# EAGLE board rly (EAGLE 9.3.0)
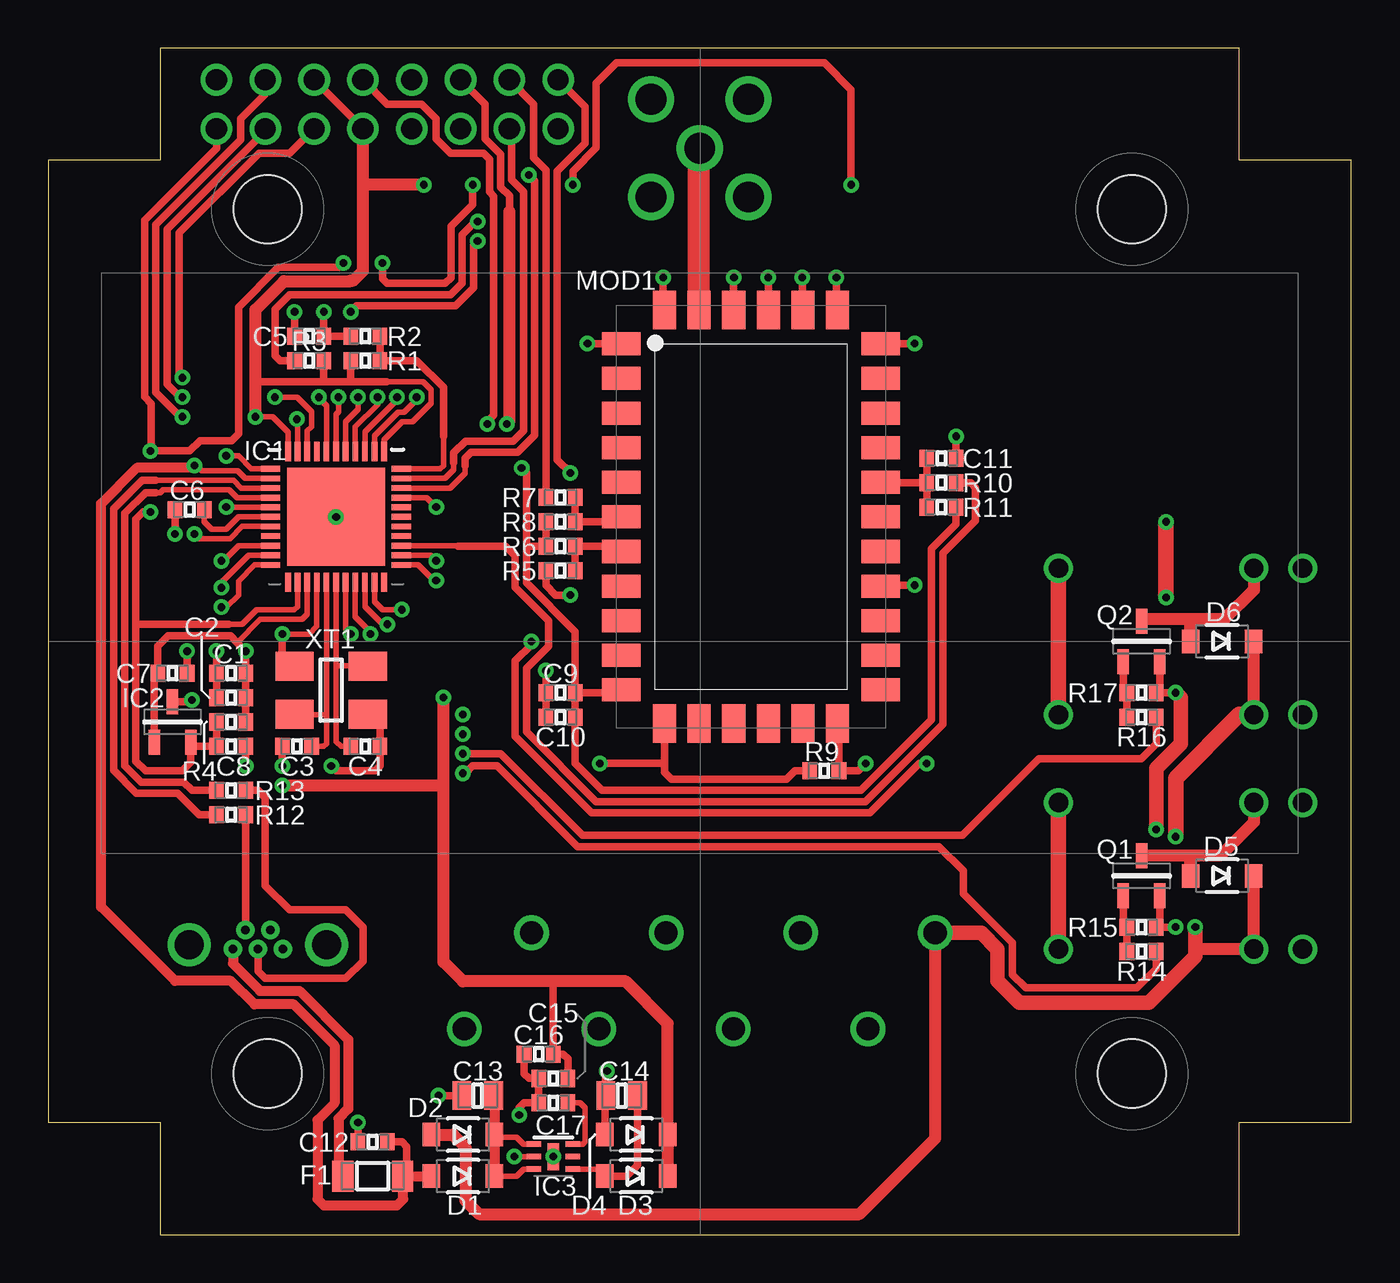
[diagram p0: board, top side]
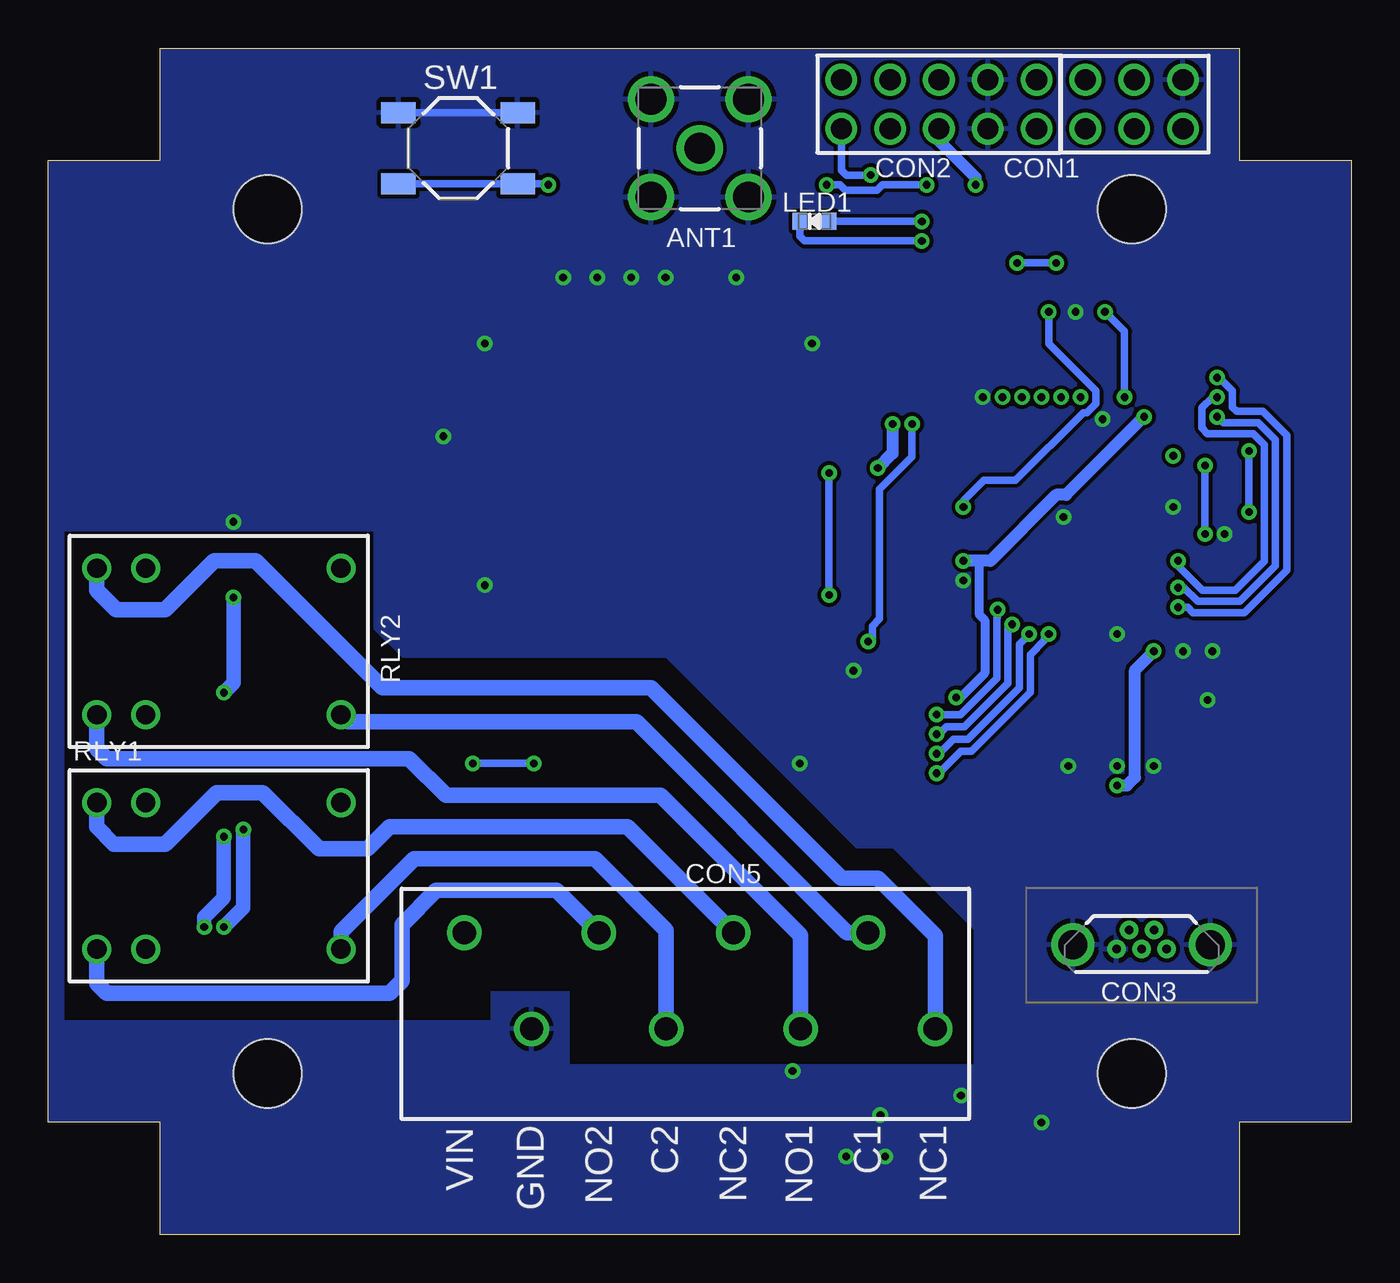
[diagram p1: board, bottom side, seen from below]

Size 67.82 x 61.72 mm. Coordinates in mm from the lower left corner, seen from the top.
Outline: 0,5.84 5.84,5.84 5.84,0 61.98,0 61.98,5.84 67.82,5.84 67.82,55.88 61.98,55.88 61.98,61.72 5.84,61.72 5.84,55.88 0,55.88 0,5.84
Copper layers (1*16): Top 0.035mm / dielectric 1.5mm / Bottom 0.035mm
Design rules "qfn": minimum track width 10mil, minimum drill 0.4mm, track to track 8mil, track to pad 10mil, pad to pad 8mil, via to via 8mil, smd to smd 0mil, copper to edge 0mil, drill to drill 6mil, minimum pad ring 10mil, minimum via ring 8mil, stop-mask expansion 4mil, vias tented up to drill 25mil, thermal gap 10mil
Holes 3.56 mm at 11.43,8.38 56.39,8.38 56.39,53.34 11.43,53.34
bRestrict: area 27.7,52.2 to 28.2,53.2

## Footprints (pad centres in the part's own frame; a part is rotated, then mirrored left to right if it is on the bottom)
SMA-RF = drill 1.6: 1 0,0; 2 -2.54,2.54; 3 -2.54,-2.54; 4 2.54,-2.54; 5 2.54,2.54
0603 = smd 0.762 x 0.889: 1 -0.762,0; 2 0.762,0
0805 = smd 0.97 x 1.47: 1 -0.83,0; 2 0.83,0
ISP = drill 1.1 pad 1.65: 1 0,0; 2 2.54,0; 3 0,-2.54; 4 2.54,-2.54; 5 0,-5.08; 6 2.54,-5.08
HEADER-10P-2R-DIP-2_54MM = drill 1.1 pad 1.65: 1 0,0; 2 2.54,0; 3 5.08,0; 4 7.62,0; 5 10.16,0; 6 0,2.54; 7 2.54,2.54; 8 5.08,2.54; 9 7.62,2.54; 10 10.16,2.54
USB-MICRO-DIP-VER = drill 0.45: 1 -1.3,0; 2 -0.65,-1; 3 0,0; 4 0.65,-1; 5 1.3,0 | drill 1.5: 6 -3.575,-0.22; 7 3.575,-0.22
CON-3_50MM-8P-1985250 = drill 1.2: 1 12.25,-2.5; 2 8.75,2.5; 3 5.25,-2.5; 4 1.75,2.5; 5 -1.75,-2.5; 6 -5.25,2.5; 7 -8.75,-2.5; 8 -12.25,2.5
SOD123-DIODE = smd 0.91 x 1.22: 1 -1.635,0; 2 1.635,0
1206 = smd 1.1 x 1.6: 1 -1.55,0; 2 1.55,0
QFN-44 = smd 1 x 0.3: 1 -3.4,2.5; 2 -3.4,2; 3 -3.4,1.5; 4 -3.4,1; 5 -3.4,0.5; 6 -3.4,0; 7 -3.4,-0.5; 8 -3.4,-1; 9 -3.4,-1.5; 10 -3.4,-2; 11 -3.4,-2.5; 23 3.4,-2.5; 24 3.4,-2; 25 3.4,-1.5; 26 3.4,-1; 27 3.4,-0.5; 28 3.4,0; 29 3.4,0.5; 30 3.4,1; 31 3.4,1.5; 32 3.4,2; 33 3.4,2.5 | smd 0.3 x 1: 12 -2.5,-3.4; 13 -2,-3.4; 14 -1.5,-3.4; 15 -1,-3.4; 16 -0.5,-3.4; 17 0,-3.4; 18 0.5,-3.4; 19 1,-3.4; 20 1.5,-3.4; 21 2,-3.4; 22 2.5,-3.4; 34 2.5,3.4; 35 2,3.4; 36 1.5,3.4; 37 1,3.4; 38 0.5,3.4; 39 0,3.4; 40 -0.5,3.4; 41 -1,3.4; 42 -1.5,3.4; 43 -2,3.4; 44 -2.5,3.4 | smd 5.1 x 5.1: 45 0,0
SOT23-3 = smd 1.3 x 0.6: 1 -1.05,0.95; 2 -1.05,-0.95; 3 1.05,0
VDFN-6 = smd 0.75 x 0.3: 1 -1.025,0.65; 2 -1.025,0; 3 -1.025,-0.65; 4 1.025,-0.65; 5 1.025,0; 6 1.025,0.65 | smd 0.6 x 1.4: 7 0,0
LED-0603 = smd 0.762 x 0.889: 1 -0.762,0; 2 0.762,0
RAK811 = smd 2 x 1.2: 1 -6.75,9; 2 -6.75,7.2; 3 -6.75,5.4; 4 -6.75,3.6; 5 -6.75,1.8; 6 -6.75,0; 7 -6.75,-1.8; 8 -6.75,-3.6; 9 -6.75,-5.4; 10 -6.75,-7.2; 11 -6.75,-9; 18 6.75,-9; 19 6.75,-7.2; 20 6.75,-5.4; 21 6.75,-3.6; 22 6.75,-1.8; 23 6.75,0; 24 6.75,1.8; 25 6.75,3.6; 26 6.75,5.4; 27 6.75,7.2; 28 6.75,9 | smd 1.2 x 2: 12 -4.5,-10.75; 13 -2.7,-10.75; 14 -0.9,-10.75; 15 0.9,-10.75; 16 2.7,-10.75; 17 4.5,-10.75; 29 4.5,10.75; 30 2.7,10.75; 31 0.9,10.75; 32 -0.9,10.75; 33 -2.7,10.75; 34 -4.5,10.75
JRC-21F-4100 = drill 1: 1 -6.35,3.81; 2 -3.81,3.81; 3 6.35,3.81; 4 -6.35,-3.81; 5 -3.81,-3.81; 6 6.35,-3.81
BUTTON-4P-SMD-5X5 = smd 1.8 x 1.1: 1 -3.1,1.85; 2 -3.1,-1.85; 3 3.1,-1.85; 4 3.1,1.85
CRYSTAL-5032-4P = smd 2 x 1.5: 1 -1.9,-1.25; 2 1.9,-1.25; 3 1.9,1.25; 4 -1.9,1.25

## Placement (x,y rotation side)
ANT1  [SMA-RF]  33.91,56.52 0 bottom
C1  [0603]  9.53,29.21 0 top
C2  [0603]  9.53,27.94 0 top
C3  [0603]  12.95,25.4 0 top
C4  [0603]  16.51,25.4 180 top
C5  [0603]  13.59,46.74 180 top
C6  [0603]  7.37,37.72 0 top
C7  [0603]  6.48,29.21 180 top
C8  [0603]  9.53,25.4 180 top
C9  [0603]  26.67,28.19 0 top
C10  [0603]  26.67,26.92 0 top
C11  [0603]  46.48,40.39 180 top
C12  [0603]  16.89,4.83 0 top
C13  [0805]  22.35,7.24 0 top
C14  [0805]  29.84,7.24 0 top
C15  [0603]  26.29,8.13 0 top
C16  [0603]  25.53,9.4 0 top
C17  [0603]  26.29,6.86 0 top
CON1  [ISP]  13.84,57.53 90 bottom
CON2  [HEADER-10P-2R-DIP-2_54MM]  26.54,57.53 0 bottom
CON3  [USB-MICRO-DIP-VER]  10.92,14.86 180 bottom
CON4  [CON-3_50MM-8P-1985250]  33.91,13.21 0 bottom
D1  [SOD123-DIODE]  21.59,3.05 180 top
D2  [SOD123-DIODE]  21.59,5.21 180 top
D3  [SOD123-DIODE]  30.61,3.05 180 top
D4  [SOD123-DIODE]  30.61,5.21 180 top
D5  [SOD123-DIODE]  61.09,18.67 180 top
D6  [SOD123-DIODE]  61.09,30.86 180 top
F1  [1206]  16.89,3.05 0 top
IC1  [QFN-44]  14.99,37.34 0 top
IC2  [SOT23-3]  6.48,26.67 90 top
IC3  [VDFN-6]  26.29,4.06 0 top
LED1  [LED-0603]  27.94,52.7 0 bottom
MOD1  [RAK811]  36.58,37.34 0 top
Q1  [SOT23-3]  56.9,18.67 90 top
Q2  [SOT23-3]  56.9,30.86 90 top
R1  [0603]  16.51,45.47 180 top
R2  [0603]  16.51,46.74 0 top
R3  [0603]  13.59,45.47 0 top
R4  [0603]  9.53,26.67 180 top
R5  [0603]  26.67,34.54 0 top
R6  [0603]  26.67,35.81 180 top
R7  [0603]  26.67,38.35 0 top
R8  [0603]  26.67,37.08 180 top
R9  [0603]  40.39,24.13 180 top
R10  [0603]  46.48,39.12 0 top
R11  [0603]  46.48,37.85 0 top
R12  [0603]  9.53,21.84 180 top
R13  [0603]  9.53,23.11 180 top
R14  [0603]  56.9,14.73 180 top
R15  [0603]  56.9,16 180 top
R16  [0603]  56.9,26.92 180 top
R17  [0603]  56.9,28.19 180 top
RLY1  [JRC-21F-4100]  58.93,18.67 0 bottom
RLY2  [JRC-21F-4100]  58.93,30.86 0 bottom
SW1  [BUTTON-4P-SMD-5X5]  46.48,56.52 180 bottom
XT1  [CRYSTAL-5032-4P]  14.73,28.32 0 top

## Library data of the parts
ANT1 C1-C17 CON1-CON4 D1-D6 F1 IC1-IC3 LED1 MOD1 Q1 Q2 R1-R17 RLY1 RLY2 SW1 XT1 = SamacSys_Parts

## Nets
GND: ANT1.2 ANT1.3 ANT1.4 ANT1.5 C1.1 C2.1 C3.1 C4.1 C5.1 C6.1 C7.1 C8.1 C9.1 C10.1 C11.1 C12.1 C13.1 C14.1 C15.1 C16.1 C17.1 CON1.6 CON2.4 CON2.9 CON3.5 CON3.6 CON3.7 CON4.7 D4.2 IC1.5 IC1.15 IC1.23 IC1.35 IC1.43 IC1.45 IC2.3 IC3.2 IC3.7 MOD1.1 MOD1.12 MOD1.21 MOD1.28 MOD1.29 MOD1.30 MOD1.31 MOD1.32 MOD1.34 Q1.2 Q2.2 R2.1 R9.2 R15.1 R17.1 SW1.2 SW1.3 XT1.2 XT1.4
N$1: IC1.37
N$2: C11.2 MOD1.24 R10.1 R11.1
N$3: CON1.1 IC1.11
N$4: ANT1.1 MOD1.33
N$5: IC1.21
N$6: MOD1.7 R5.2 R6.1
N$7: MOD1.6 R7.2 R8.1
N$8: IC1.36
N$9: CON1.4 IC1.10
N$10: C3.2 IC1.16 XT1.1
N$11: CON2.1 IC1.31
N$12: C4.2 IC1.17 XT1.3
N$13: C9.2 C10.2 CON2.8 MOD1.11 R6.2 R8.2 R11.2
N$14: CON2.7 R7.1
N$15: Q1.1 R14.2 R15.2
N$16: IC1.25 R10.2
N$17: IC1.39
N$18: IC1.38
N$19: IC1.30 LED1.1
N$20: Q2.1 R16.2 R17.2
N$21: CON4.1 RLY2.1
N$22: D5.2 Q1.3 RLY1.2
N$23: D6.2 Q2.3 RLY2.2
N$24: CON4.3 RLY2.4
N$25: CON4.4 RLY1.1
N$26: CON4.2 RLY2.3 RLY2.6
N$27: IC1.40
N$29: CON2.2 IC1.32
N$30: CON4.6 RLY1.4
N$31: C5.2 IC1.42
N$32: CON4.5 RLY1.3 RLY1.6
N$33: CON3.1 F1.1
N$34: C6.2 IC1.6
N$35: LED1.2 R3.1
N$37: C17.2 IC3.6
N$38: C13.2 D1.1 D2.1 IC3.1 IC3.3
N$39: IC1.1
N$40: C14.2 D3.2 IC3.4
N$41: CON3.2 R12.1
N$42: CON3.3 R13.1
N$43: IC1.3 R12.2
N$44: IC1.4 R13.2
N$45: CON1.3 IC1.9
N$52: IC1.18 R14.1
N$54: IC1.19 R16.1
N$57: IC1.20
N$60: CON2.6 R5.1
N$61: IC1.33 R1.1 R2.2
N$63: CON2.10 MOD1.17 R9.1
N$64: C8.2 CON1.5 IC1.13 IC2.2 R4.2 SW1.1 SW1.4
UVCC: C12.2 D1.2 F1.2 IC1.2 IC1.7
VCC: C1.2 C2.2 C7.2 C15.2 C16.2 CON1.2 CON2.3 CON2.5 D3.1 D4.1 IC1.14 IC1.24 IC1.34 IC1.44 IC2.1 R1.2 R3.2 R4.1
VEXT: CON4.8 D2.2 D5.1 D6.1 RLY1.5 RLY2.5

## Tracks (layer width: path | path; a pad name or v marks a point on that pad's centre or on a via)
GND  (via drill 0.4)
  Top 0.292: IC1.43 12.99,42.39 v12.95,42.42 | IC1.35 16.99,41.5 16.99,41.57 18.21,42.79 18.53,42.79 19.18,43.43 v19.18,43.56 | IC1.5 9.28,37.84 v9.27,37.85 | IC1.15 13.99,31.64 13.58,31.24 v12.2,31.24 v12.19,31.24 | IC3.2 v24.26,4.06 | IC1.23 19.26,34.84 20.07,34.04 v20.19,34.04
  Top 0.381: C3.1 v12.19,24.38 | v14.73,24.38 14.99,24.13 17.02,24.13 17.27,24.38 C4.1 17.27,26.43 XT1.2 | C8.1 v10.29,24.38 | C7.1 v7.24,30.35 | IC2.3 7.4,27.72 v7.49,27.81 | v8.76,30.35 C1.1 C2.1 | MOD1.34 32,48.16 v32,49.78 | MOD1.1 29.81,46.35 v28.07,46.35 | MOD1.32 35.68,49.77 v35.69,49.78 | MOD1.31 v37.48,49.77 v37.47,49.78 | MOD1.30 39.24,48.12 v39.24,49.78 | MOD1.29 41.02,48.14 v41.02,49.78 | MOD1.28 43.34,46.35 v45.09,46.35 | MOD1.21 43.37,33.78 v45.09,33.78 | C10.1 C9.1 v25.91,29.34 | C6.1 v6.6,36.45 | C13.1 v20.32,7.24 | v16.13,5.84 C12.1 | C16.1 24.77,8.38 25.02,8.13 C15.1 C17.1 24.77,6.86 24.51,6.6 v24.51,6.22 | D4.2 28.97,7.2 C14.1 29.02,8.44 v29.08,8.51 | R2.1 C5.1 v14.35,48.01 | C11.1 v47.24,41.53 | v12.19,31.24 12.19,30.21 XT1.4 | R9.2 38.86,24.13 38.43,23.7 32.44,23.7 32.08,24.06 32.08,24.51 | Q1.2 57.85,16.19 R15.1 v58.67,16 | Q2.2 57.85,28.38 R17.1 v58.67,28.19 | 32.08,24.51 MOD1.12 | v28.7,24.51 32.08,24.51
  Top 0.762: v58.67,28.19 58.93,27.94 58.93,25.53 57.66,24.26 v57.66,21.08
  Top 0.813: v58.17,37.08 v58.17,33.15
  Bottom 0.381: SW1.2 SW1.3
  Bottom 0.762: v57.66,21.08 57.66,17.02 v58.67,16 | v58.17,33.15 58.17,28.7 v58.67,28.19
  other vias: 14.99,37.34 26.29,4.06
  pour Bottom: 0.13,5.97 0.13,55.75 5.97,55.75 5.97,61.59 61.85,61.59 61.85,55.75 67.69,55.75 67.69,5.97 61.85,5.97 61.85,0.13 5.97,0.13 5.97,5.97
N$1  (via drill 0.4)
  Top 0.292: IC1.37 15.99,42.02 17.14,43.18 v17.14,43.56
N$2
  Top 0.381: R10.1 R11.1 | MOD1.24 43.35,39.12 R10.1 | R10.1 C11.2
N$3  (via drill 0.4)
  Top 0.292: IC1.11 10.76,34.84 9.91,33.99 9.91,33.27 9.27,32.64 v9.02,32.64
  Top 0.381: CON1.1 12.57,56.26 10.99,56.26 6.83,52.11 6.83,44.73 v6.99,44.58
  Bottom 0.381: v6.99,44.58 6.87,44.58 6.19,43.89 6.19,43.04 5.97,42.82 4.61,42.82 3.37,41.58 3.37,34.55 5.56,32.36 8.25,32.36 8.53,32.64 v9.02,32.64
N$4
  Top 1.143: MOD1.33 33.88,56.48 ANT1.1
N$5  (via drill 0.4)
  Top 0.292: IC1.21 16.99,32.92 17.4,32.51 v18.41,32.51
  Bottom 0.381: v18.41,32.51 18.41,32.12 18.46,32.07 18.46,28.95 19.78,27.63 19.78,27.61 20.34,27.05 v21.59,27.05
N$6
  Top 0.381: R5.2 R6.1 29.55,35.81 MOD1.7
N$7
  Top 0.381: R7.2 R8.1 29.57,37.08 MOD1.6
N$8  (via drill 0.4)
  Top 0.292: IC1.36 16.49,41.63 16.49,41.64 16.49,41.77 18.16,43.44 v18.16,43.56
N$9  (via drill 0.4)
  Top 0.292: IC1.10 10.45,35.34 9.02,33.91 v9.02,33.66
  Top 0.381: CON1.4 11.3,59.33 10.03,58.06 10.03,56.96 5.6,52.53 5.6,43.81 6.87,42.55 v6.99,42.55
  Bottom 0.381: v6.99,42.55 6.68,42.24 4.85,42.24 3.95,41.34 3.95,34.8 5.81,32.94 8.01,32.94 8.72,33.66 v9.02,33.66
N$10
  Top 0.292: IC1.16 14.49,27.05 | 14.49,27.05 14.49,25.54 14.35,25.4 C3.2 | XT1.1 12.85,27.05 14.49,27.05
N$11  (via drill 0.4)
  Top 0.292: IC1.31 20.93,38.84 21.7,39.6 21.7,40.01
  Top 0.381: v25.02,55.12 25.32,54.81 25.32,41.58 24.43,40.69 22,40.69 21.7,40.39 21.7,40.01
  Bottom 0.381: v25.02,55.12 26.29,55.12 26.54,55.37 CON2.1
N$12
  Top 0.292: IC1.17 14.99,29.59 | 14.99,29.59 14.99,25.65 15.24,25.4 C4.2 | XT1.3 16.61,29.59 14.99,29.59
N$13  (via drill 0.4)
  Top 0.381: C9.2 C10.2 27.43,24.51 28.83,23.11 42.29,23.11 45.97,26.8 45.97,35.69 47.24,36.96 R11.2 | C9.2 29.68,28.19 MOD1.11 | R8.2 R6.2 24.89,35.81 | C9.2 27.43,31.37 24.89,33.91 24.89,35.81 | v24.64,39.88 24.89,39.62 24.89,35.81 | CON2.8 22.73,58.8 22.73,57.01 23.55,56.19 23.55,54.49 24,54.04 24,53.21
  Top 0.635: v23.88,42.16 24,42.29 24,53.21
  Bottom 0.635: v23.88,42.16 23.88,40.64 v24.64,39.88
N$14
  Top 0.381: CON2.7 25.27,58.8 25.27,56.01 25.91,55.37 R7.1
N$15
  Top 0.381: Q1.1 55.95,16.19 R15.2 R14.2
N$16
  Top 0.292: 21.34,35.81 21.31,35.84 IC1.25
  Top 0.381: R10.2 48.01,39.12 48.26,38.86 48.26,37.15 46.56,35.45 46.56,26.55 42.53,22.53 28.52,22.53 24.89,26.16 24.89,29.46 26.04,30.61 26.04,31.94 24.31,33.67 24.31,35.31 23.8,35.81 21.34,35.81
N$17  (via drill 0.4)
  Top 0.292: IC1.39 14.99,42.67 15.11,42.8 v15.11,43.56
N$18  (via drill 0.4)
  Top 0.292: IC1.38 15.49,42.28 16.13,42.93 v16.13,43.56
N$19  (via drill 0.4)
  Top 0.292: IC1.30 19.7,38.34 v20.19,37.85
  Top 0.381: v15.75,48.01 16.05,48.31 21.2,48.31 22.14,49.25 22.14,51.48 v22.35,51.69
  Bottom 0.381: LED1.1 28.7,51.94 28.45,51.69 v22.35,51.69 | v15.75,48.01 15.75,46.34 13.3,43.89 13.3,43.23 13.77,42.76 13.96,42.76 17.48,39.24 19.13,39.24 20.17,38.2 20.17,37.87 v20.19,37.85
N$20
  Top 0.381: Q2.1 55.95,28.38 R17.2 R16.2
N$21
  Bottom 0.813: CON4.1 21.66,15.56 24.64,18.54 26.54,18.54 36.45,28.45 50.42,28.45 57.02,35.05 59.18,35.05 61.72,32.51 64.26,32.51 65.28,33.53 RLY2.1
N$22
  Top 0.635: RLY1.2 62.74,21.46 60.99,19.72 59.44,19.72 | 59.44,19.72 Q1.3 | D5.2 59.44,18.68 59.44,19.72
N$23
  Top 0.635: RLY2.2 62.74,33.53 61.21,32 59.44,32 | 59.44,32 56.99,32 Q2.3 | D6.2 59.44,30.88 59.44,32
N$24
  Bottom 0.813: CON4.3 28.66,15.58 35.94,22.86 47.12,22.86 49.02,24.77 64.77,24.77 65.28,25.27 RLY2.4
N$25
  Bottom 0.813: CON4.4 37.66,21.21 50.04,21.21 51.18,20.07 53.72,20.07 56.64,22.99 59.05,22.99 61.72,20.32 64.39,20.32 65.28,21.21 RLY1.1
N$26
  Top 0.813: RLY2.3 RLY2.6
  Bottom 0.813: CON4.2 26.25,15.71 37.21,26.67 52.2,26.67 RLY2.6
N$27  (via drill 0.4)
  Top 0.292: v14.1,43.56 14.1,43.51 14.49,43.12 IC1.40
N$29
  Top 0.292: IC1.32 20.67,39.34 21.11,39.78 21.11,40.16
  Top 0.381: CON2.2 24.13,57.4 24.13,54.86 24.74,54.25 24.74,41.82 24.19,41.27 21.72,41.27 21.11,40.67 21.11,40.16
N$30
  Bottom 0.813: CON4.6 41.36,17.91 47.62,17.91 49.4,16.13 49.4,13.21 50.04,12.57 64.77,12.57 65.28,13.08 RLY1.4
N$31  (via drill 0.4)
  Top 0.292: IC1.42 13.49,41.81 13.72,42.04 13.72,42.8 12.95,43.56 v11.81,43.56
  Top 0.381: C5.2 v12.83,48.01
  Bottom 0.381: v11.81,43.56 11.81,46.99 v12.83,48.01
N$32
  Top 0.813: RLY1.3 RLY1.6
  Bottom 0.813: CON4.5 35.66,15.85 39.37,19.56 48.77,19.56 52.58,15.75 RLY1.6
N$33
  Top 0.508: CON3.1 9.62,14.1 11.04,12.69 13.08,12.69 15.62,10.15 15.62,6.55 15.11,6.04 15.11,3.28 F1.1
N$34
  Top 0.292: IC1.6 9.91,37.34 9.27,36.7 8.51,36.7 8.13,37.08 C6.2
N$35  (via drill 0.4)
  Top 0.381: R3.1 12.06,45.47 11.81,45.72 11.81,48.13 12.57,48.9 20.95,48.9 21.55,49.49 21.55,52.02 22.24,52.7 v22.35,52.7
  Bottom 0.381: LED1.2 v22.35,52.7
N$37
  Top 0.292: IC3.6 27.83,4.71 27.94,4.83 27.94,6.6 27.69,6.86 C17.2
N$38
  Top 0.292: IC3.1 24.75,4.71 24.38,5.08 23.35,5.08 D2.1 | IC3.3 24.75,3.41 24.38,3.05 D1.1
  Top 0.508: D1.1 D2.1 23.23,7.2 C13.2
N$39  (via drill 0.4)
  Top 0.292: IC1.1 10.58,39.84 9.91,40.51 v9.27,40.51
N$40
  Top 0.292: IC3.4 28.61,3.41 D3.2
  Top 0.381: C14.2 30.68,3.62 30.1,3.05 D3.2
N$41
  Top 0.381: R12.1 10.29,19.3 10.27,19.29 CON3.2
N$42
  Top 0.381: CON3.3 10.92,13.72 11.3,13.34 15.49,13.34 16.38,14.22 16.38,16 15.49,16.89 12.57,16.89 11.3,18.16 11.3,22.73 10.92,23.11 R13.1
N$43
  Top 0.292: IC1.3 10.06,38.84 9.65,39.24 5.59,39.24
  Top 0.381: 5.59,39.24 4.89,39.24 3.4,37.76 3.4,24.15 4.6,22.96 6.76,22.96 7.87,21.84 R12.2
N$44
  Top 0.292: IC1.4 9.84,38.34 9.43,38.75 5.98,38.75 5.83,38.6 5.6,38.6
  Top 0.381: 5.6,38.6 5.07,38.6 3.99,37.52 3.99,24.4 4.84,23.55 7.06,23.55 7.49,23.11 R13.2
N$45  (via drill 0.4)
  Top 0.292: IC1.9 9.93,35.84 9.14,35.05 v9.02,35.05
  Top 0.381: CON1.3 11.3,57.4 6.19,52.29 6.19,44.25 6.87,43.56 v6.99,43.56
  Bottom 0.381: v6.99,43.56 7.22,43.56 7.78,43 7.78,41.96 7.49,41.67 7.49,41.66 5.1,41.66 4.54,41.1 4.54,35.04 6.05,33.53 7.76,33.53 9.02,34.78 v9.02,35.05
N$46
  cutout Bottom: 19.68,8.89 40.64,8.89 40.64,12.7 44.83,12.7 44.83,11.18 66.93,11.18 66.93,36.58 50.93,36.58 50.93,31.5 49.4,29.97 35.69,29.97 25.78,20.07 23.88,20.07 19.68,15.88
N$52  (via drill 0.4)
  Top 0.292: IC1.18 15.49,31.5 v15.75,31.24
  Top 0.381: v21.59,24 21.72,24 22.1,24.38 23.36,24.38 27.56,20.19 46.35,20.19 47.62,18.92 47.62,17.73 50.18,15.18 50.18,13.53 50.87,12.84 56.66,12.84 57.66,13.84 R14.1
  Bottom 0.381: v15.75,31.24 15.97,31.02 15.97,30.91 16.7,30.18 16.7,28.2 19.76,25.15 20.32,25.15 21.46,24 v21.59,24
N$54  (via drill 0.4)
  Top 0.292: IC1.19 15.99,32.15 16.76,31.37 v16.76,31.24
  Top 0.381: v21.59,25.02 23.56,25.02 27.8,20.78 47.57,20.78 51.56,24.77 56.9,24.77 57.66,25.53 R16.1
  Bottom 0.381: v16.76,31.24 17.29,30.72 17.29,28.45 19.95,25.78 20.7,25.78 21.46,25.02 v21.59,25.02
N$57  (via drill 0.4)
  Top 0.292: IC1.20 16.49,32.66 17.4,31.75 v17.65,31.75
  Bottom 0.381: v17.65,31.75 17.87,31.53 17.87,28.69 20.14,26.42 21.08,26.42 21.46,26.04 v21.59,26.04
N$60  (via drill 0.4)
  Top 0.381: CON2.6 27.94,58.67 27.94,56.77 26.49,55.32 26.49,40.31 v27.18,39.62 | R5.1 25.91,33.78 26.42,33.27 v27.18,33.27
  Bottom 0.381: v27.18,33.27 v27.18,39.62
N$61
  Top 0.292: IC1.33 20.41,39.84 20.57,40.01 20.57,41.53
  Top 0.381: R2.2 R1.1 19.18,45.47 20.57,44.07 20.57,41.53
N$63  (via drill 0.4)
  Top 0.381: MOD1.17 41.15,26.52 R9.1 42.16,24.13 v42.55,24.51 | CON2.10 17.65,58.8 19.45,58.8 20.19,58.06 20.19,57.01 20.94,56.26 22.65,56.26 22.96,55.95 22.96,54.24 23.19,54.01 23.19,42.62 22.86,42.29 v22.86,42.16 | v45.72,24.51 45.34,24.51 42.77,21.95 28.28,21.95 24.31,25.92 24.31,29.86 25.15,30.7 v25.15,30.86
  Bottom 0.381: v45.72,24.51 v42.55,24.51 | v25.15,30.86 24.93,31.08 24.93,31.65 24.55,32.03 24.55,38.77 22.86,40.47 v22.86,42.16
N$64  (via drill 0.4)
  Top 0.292: IC1.13 12.99,32.67 12.81,32.5 10.84,32.5 10.1,31.75 9.4,31.75
  Top 0.381: R4.2 C8.2 7.65,25.4 IC2.2 7.43,24.57 6.99,24.13 5.08,24.13 4.57,24.64 4.57,31.75 | CON1.5 8.76,56.52 5.02,52.77 5.02,43.57 5.37,43.22 5.37,40.81 v5.33,40.77 7.38,40.77 7.92,41.31 9.56,41.31 9.91,41.66 9.91,48.24 11.98,50.32 15.14,50.32 v15.37,50.55 | v5.33,37.59 4.95,37.59 4.57,37.21 4.57,31.75 | 9.4,31.75 4.57,31.75 | v41.78,54.61 41.78,59.56 40.39,60.96 29.59,60.96 28.52,59.89 28.52,56.53 27.3,55.31 v27.3,54.61 | v17.4,50.55 17.4,49.73 17.65,49.48 20.67,49.48 20.97,49.78 20.97,52.45 22.1,53.58 v22.1,54.61
  Bottom 0.381: v5.33,40.77 v5.33,37.59 | SW1.4 SW1.1 41.84,54.66 v41.78,54.61 | v22.1,54.61 24.4,54.61 24.69,54.32 26.32,54.32 26.61,54.61 v27.3,54.61 | v17.4,50.55 v15.37,50.55
UVCC  (via drill 0.4)
  Top 0.292: IC1.7 10.11,36.84 9.48,36.21 7.86,36.21 v7.62,36.45 | v7.62,40.01 7.73,40.01 8,39.74 9.86,39.74 10.26,39.34 IC1.2
  Top 0.381: C12.2 18.41,4.83 18.67,4.57 18.67,3.05
  Top 0.508: v7.62,40.01 7.51,39.89 4.62,39.89 2.76,38.03 2.76,17.06 6.6,13.21 9.51,13.21 10.74,11.98 12.79,11.98 14.91,9.86 14.91,6.84 14.02,5.96 14.02,1.85 14.35,1.52 18.16,1.52 18.48,1.85 18.48,3.01 F1.2 18.67,3.05 D1.2
  Bottom 0.381: v7.62,40.01 v7.62,36.45
VCC  (via drill 0.4)
  Top 0.292: IC1.14 13.49,32.28 13.21,32 11.05,32 9.84,30.8 | IC1.24 19.91,35.34 v20.19,35.05 | IC1.44 12.49,41.74 11.68,42.55 v10.79,42.55 | IC1.34 17.49,41.36 18.41,42.29 18.97,42.29 19.94,43.26 19.94,43.94 19.52,44.36 17.62,44.36
  Top 0.381: IC2.1 5.53,29.02 C7.2 5.71,30.61 6.26,31.15 9.49,31.15 9.84,30.8 v10.29,30.35 C1.2 C2.2 R4.1 | C15.2 27.05,9.14 26.8,9.4 C16.2 26.29,13.17 | CON1.2 CON2.5 | 17.62,44.36 15.75,44.36 | 15.75,44.36 14.35,44.36 | R1.2 15.75,44.36 | R3.2 14.35,44.36 | 10.79,44.58 11.01,44.36 14.35,44.36
  Top 0.635: D3.1 D4.1 32.24,10.99 30.06,13.17 26.29,13.17 21.59,13.17 20.57,14.19 20.57,23.37 | v10.79,42.55 10.79,44.58 10.79,48.12 12.28,49.61 15.75,49.61 15.76,49.62 15.88,49.62 16.38,50.13 16.38,54.61 | 16.38,54.61 CON2.5 | v19.56,54.61 16.38,54.61 | 20.57,23.37 v20.57,27.94 | v12.19,23.37 20.57,23.37
  Bottom 0.457: v20.57,27.94 20.46,27.82 19.08,29.21 19.08,31.96 19.36,32.24 19.36,35 19.3,35.05
  Bottom 0.635: v12.19,23.37 11.68,23.37 11.27,23.78 11.27,29.37 v10.29,30.35 | CON2.3 21.46,56.9 19.56,54.99 v19.56,54.61 | v20.19,35.05 19.3,35.05 18.8,35.05 15.37,38.48 14.86,38.48 v10.79,42.55
VEXT  (via drill 0.4)
  Top 0.635: D2.2 21.08,5.21 21.72,4.57 21.72,1.78 22.43,1.07 42.22,1.07 46.16,5.01 CON4.8 | D5.1 62.72,14.88 RLY1.5 59.69,14.86 | D6.1 62.72,27.07 RLY2.5
  Top 0.762: CON4.8 48.55,15.71 49.4,14.86 49.4,13.21 50.55,12.06 57.28,12.06 59.69,14.48 59.69,14.86 v59.69,16
  Top 0.813: v58.67,20.7 58.67,23.75 61.99,27.07 62.72,27.07
  Bottom 0.762: v58.67,20.7 58.67,17.53 59.69,16.51 v59.69,16

## Text on the board
bNames: CON5 | NC1 | C1 | NO1 | NC2 | C2 | NO2 | GND | VIN